# Altium PCB SISTEM.PcbDoc
Units mm, origin at the board's own origin, x right, y up, seen from the top; angles counter-clockwise.
Board outline 152.4 x 101.6 mm, 2 copper layers (Top Layer, Bottom Layer); 41 components, 50 nets, 190 pads, 45 vias.
Unrouted connection lines stored in the file: 2.
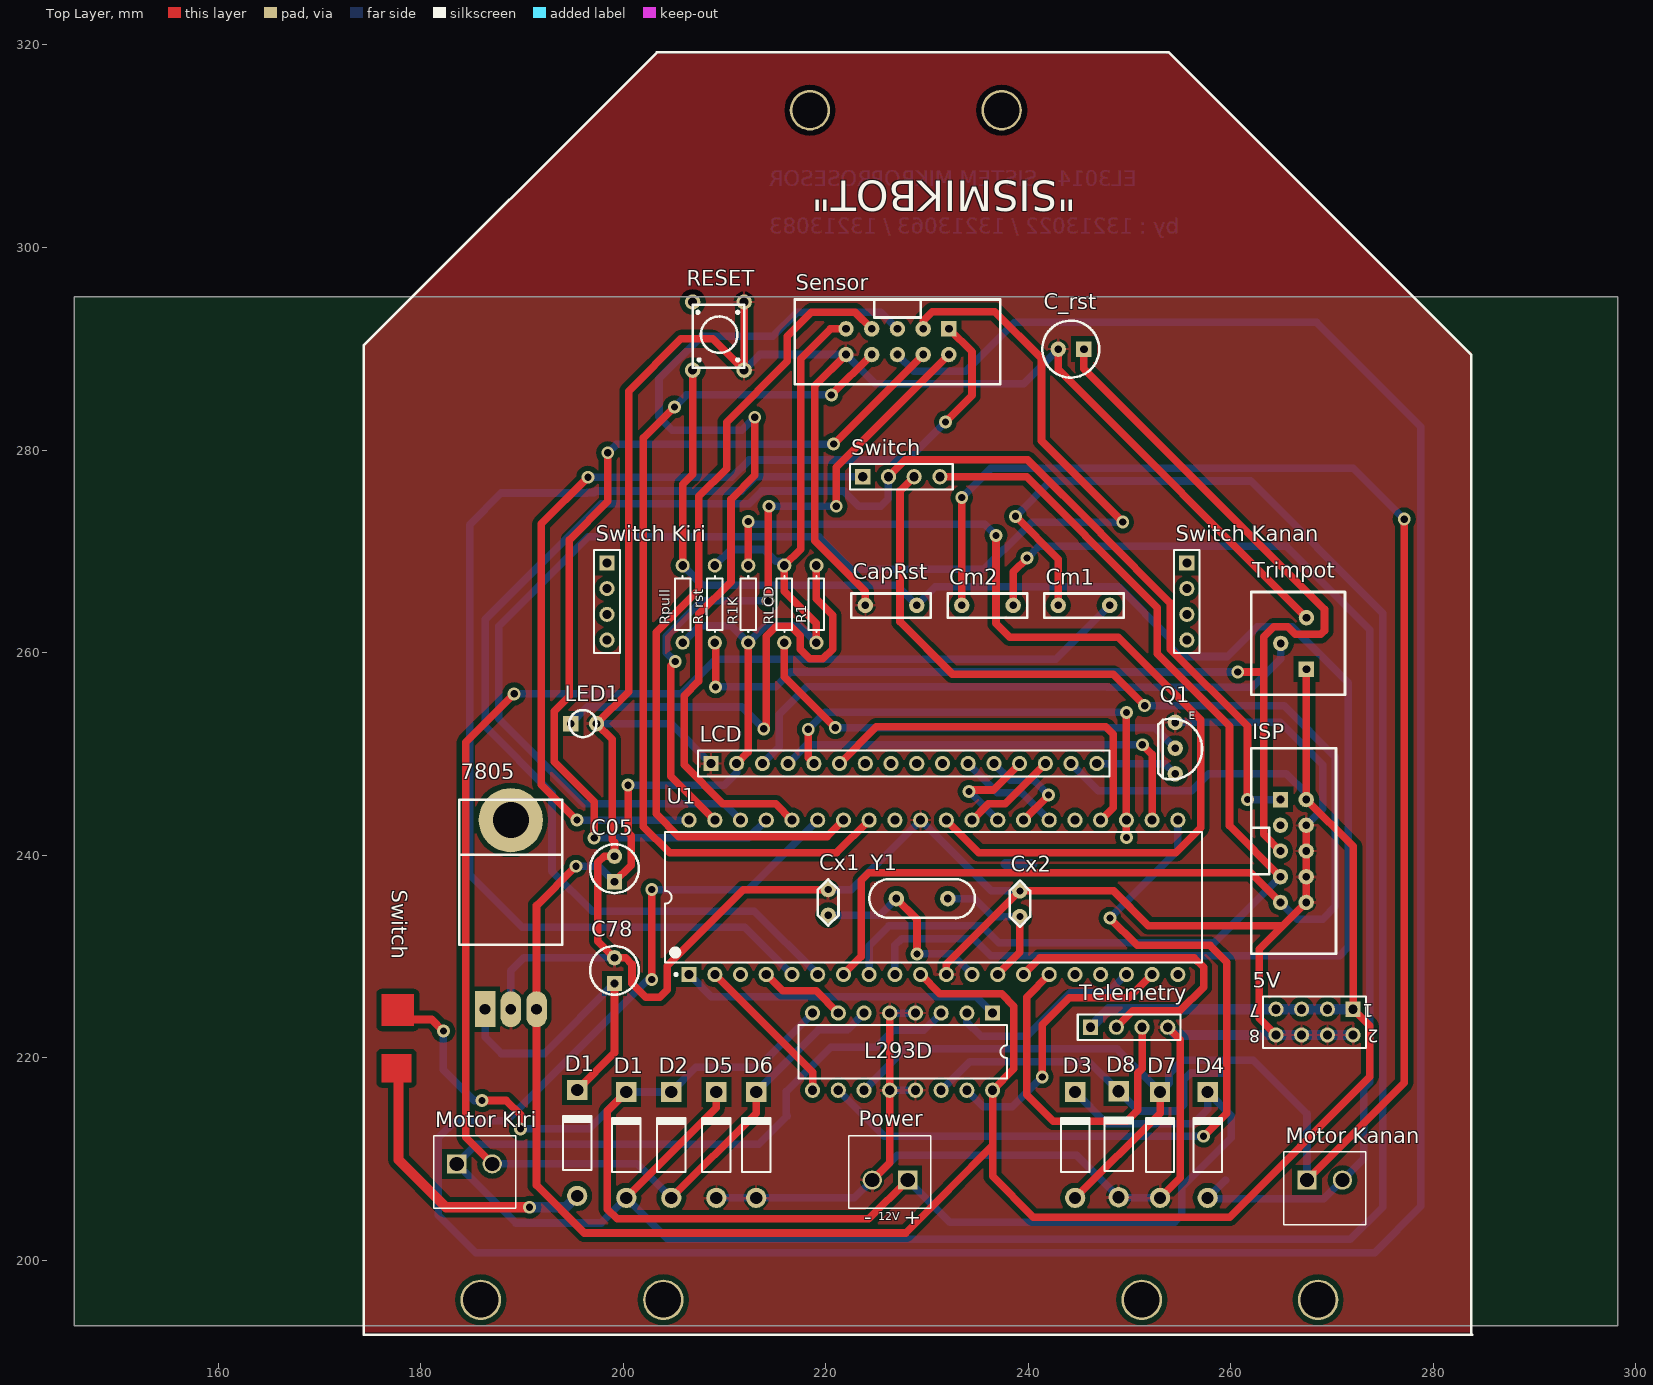
[diagram p0: Top Layer view]
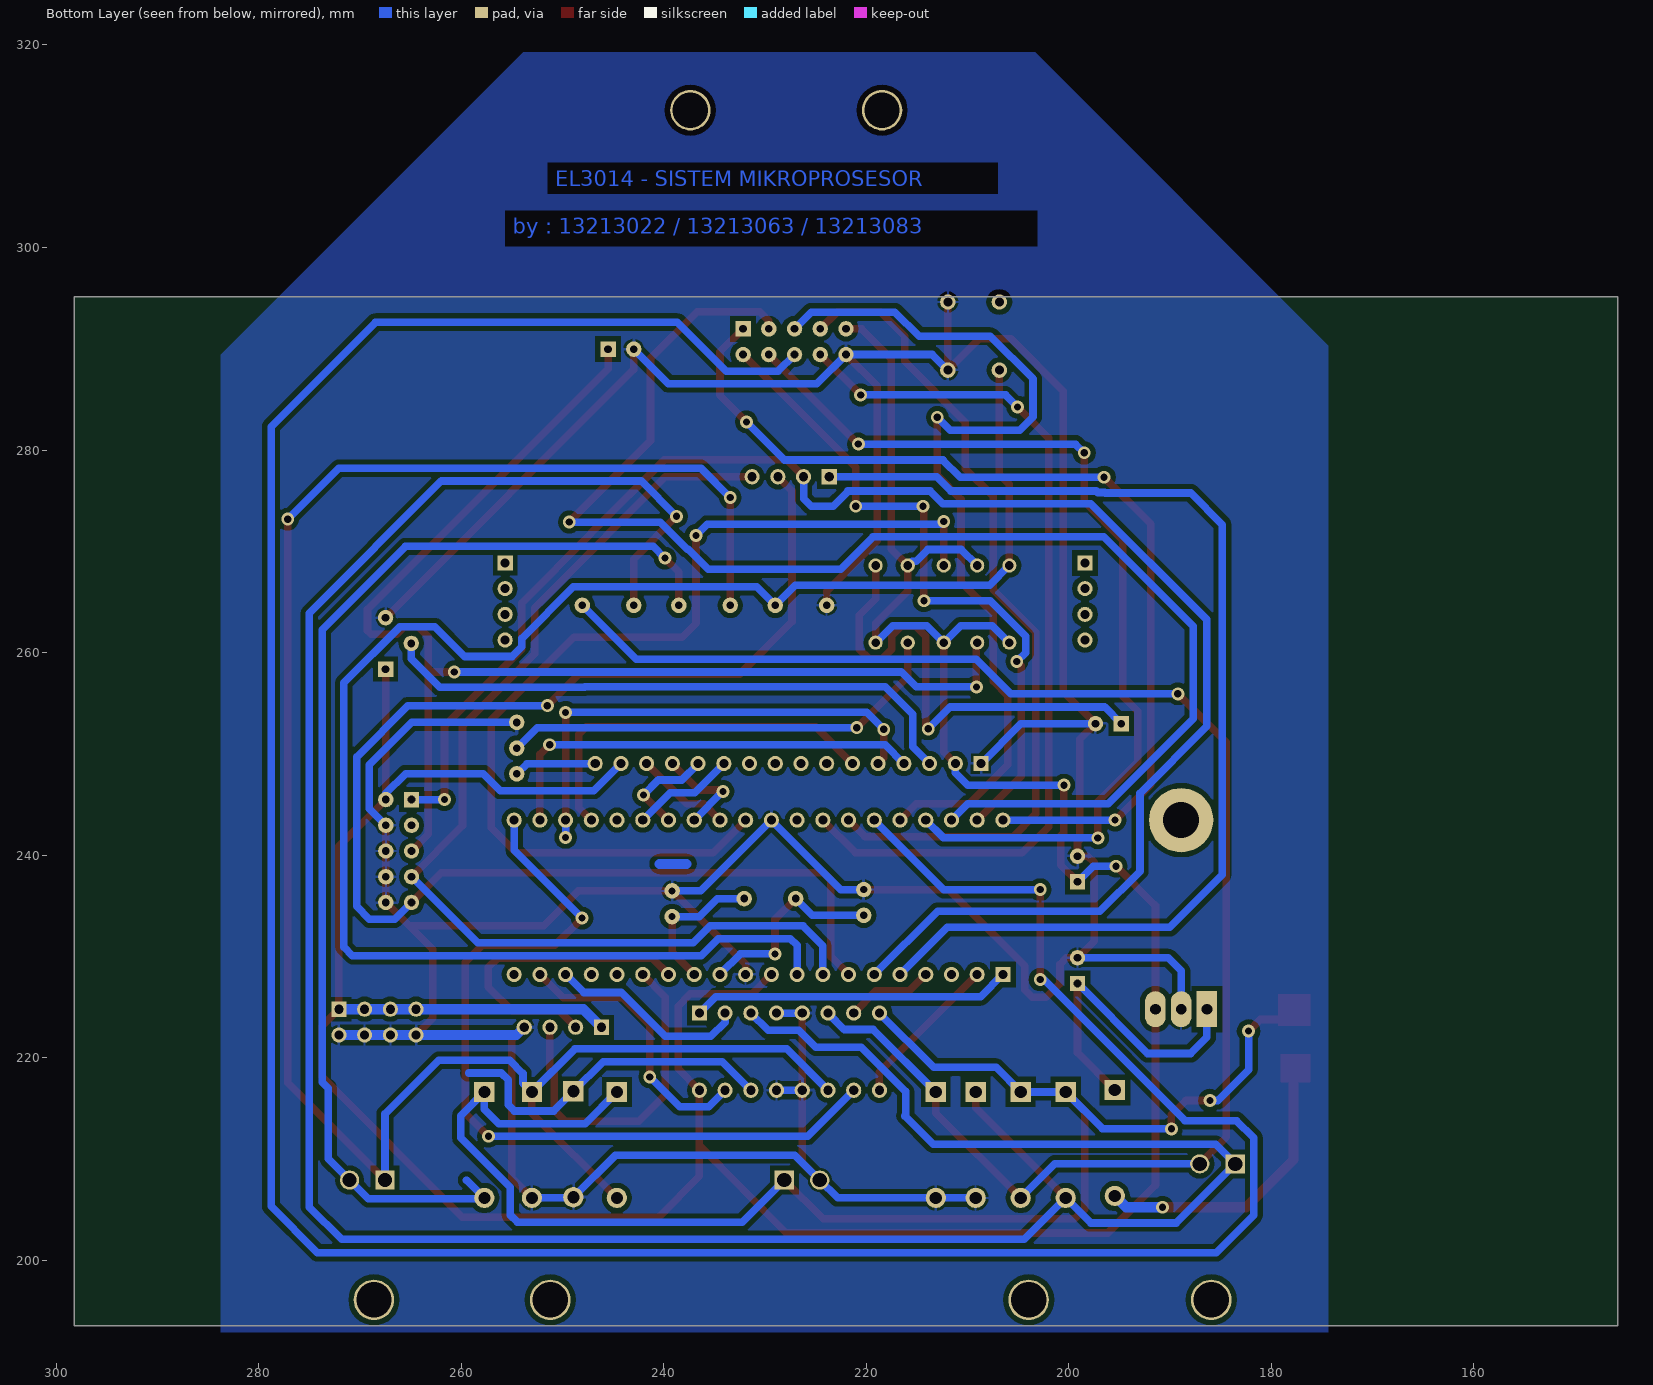
[diagram p1: Bottom Layer view, seen from below]

## Layer stack, top to bottom
Top Solder: solder mask 0.0102, Solder Resist, Dk 3.5
Top Layer: signal copper 0.0356
Dielectric 1: dielectric 0.32, FR-4, Dk 4.8
Bottom Layer: signal copper 0.0356
Bottom Solder: solder mask 0.0102, Solder Resist, Dk 3.5

## Board outline
145.796,193.548 298.196,193.548 298.196,295.148 145.796,295.148

## Design rules (kind name [scope] priority, off if disabled: settings)
Clearance Clearance_1 [All] p1: gap=0.5
Clearance Jalur [All] p2: gap=0.5
PolygonConnect [All] p1: connectstyle=Relief reliefconductorwidth=0.254 reliefentries=4 polygonreliefangle="90 Angle" airgapwidth=0.254
RoutingVias [All] p1: holewidth=0.711 width=1.27 viastyle="Through Hole" minholewidth=0.711 minwidth=1.27 maxholewidth=0.711 maxwidth=1.27
SolderMaskExpansion [All] p1: expansion=0.102
Width [All] p1: maxlimit=1 minlimit=0.5 preferedwidth=0.75
30 further rules are at their usual default settings.

## Components (designator, comment, footprint, x,y, rotation, side; value= is the part's Value field where it differs from the comment)
5V "Header 4X2" HDR2X4 272.068,224.79 r180 top
7805 "78XX/79XX" 78XX/79XX 176.657,230.886 r90 top
C05 "cap 220uF/16V" "cap 10uF/16V" 199.136,239.903 r90 top
C78 "cap 220uF/16V" "cap 10uF/16V" 199.136,229.87 r90 top
C_rst "cap 220uF/16V" "cap 220uF/16V" 245.491,289.967 r180 top
CapRst "cap MKM 100nF" "cap MKM 100nF diri" 226.441,264.668 r180 top
Cm1 "cap MKM 100nF" "cap MKM 100nF diri" 245.491,264.668 r180 top
Cm2 "cap MKM 100nF" "cap MKM 100nF diri" 235.966,264.668 r180 top
Cx1 "cap 22/33uF" "cap 22/33uF" 220.241,244.221 r270 top
Cx2 "cap 22/33uF" "cap 22/33uF" 239.164,244.094 r270 top
D1 "Diode 1N4002" DIO10.46-5.3x2.8 195.453,211.582 r90 top
D1 "Diode 1N4001" DIO10.46-5.3x2.8 200.302,211.386 r90 top
D2 "Diode 1N4001" DIO10.46-5.3x2.8 204.747,211.386 r90 top
D3 "Diode 1N4001" DIO10.46-5.3x2.8 244.625,211.386 r90 top
D4 "Diode 1N4001" DIO10.46-5.3x2.8 257.706,211.386 r90 top
D5 "Diode 1N4001" DIO10.46-5.3x2.8 209.192,211.386 r90 top
D6 "Diode 1N4001" DIO10.46-5.3x2.8 213.129,211.386 r90 top
D7 "Diode 1N4001" DIO10.46-5.3x2.8 253.007,211.386 r90 top
D8 "Diode 1N4001" DIO10.46-5.3x2.8 248.92,211.455 r90 top
ISP "Header Soket male 10 pin" "Header Soket male 10 pin" 262.357,242.951 r270 top
L293D "L293D" DIP16 227.584,220.599 r180 top (schematic designator U2)
LCD "Header 16" HDR1X16 208.661,249.047 r0 top
LED1 "LED kecil" "LED kecil" 197.358,255.524 r0 top
"Motor Kanan" "WE-Terminal Blocks Plugable Type 691321100002" 691321100002 269.263,207.918 r0 top
"Motor Kiri" "WE-Terminal Blocks Plugable Type 691321100002" 691321100002 185.316,209.518 r0 top
Power "WE-Terminal Blocks Plugable Type 691321100002" 691321100002 226.337,207.918 r180 top
Q1 "NPN 222" "NPN (222)" 254.508,250.571 r0 top
R1 "Res1" AXIAL-0.3 219.075,264.795 r270 top
R1K "Res1" AXIAL-0.3 212.344,264.795 r270 top (schematic designator L1)
R_rst "Res1" AXIAL-0.3 209.042,264.795 r90 top
RESET "pushbutton" pushbutton 209.423,280.272 r270 top
RLCD "Res1" AXIAL-0.3 215.9,264.795 r90 top
Rpull "Res1" AXIAL-0.3 205.867,264.795 r270 top
Sensor "Header Soket male 10 pin" "Header Soket male 10 pin" 229.616,294.513 r180 top
Switch "Header 4" HDR1X4 223.647,277.368 r0 top
"Switch Kanan" "Header 4" HDR1X4 255.651,268.859 r270 top
"Switch Kiri" "Header 4" HDR1X4 198.397,268.859 r270 top
Telemetry "Header 4" HDR1X4 246.149,223.012 r0 top
Trimpot "Trimpot" "Trimpot Duduk" 264.922,263.271 r180 top
U1 "ATmega32-16PI" 40P6 230.632,235.839 r90 top
Y1 "XTAL" XTAL 229.512,233.172 r0 top

## Footprints (in the part's own frame and the unit in brackets; to place one, negate y for a bottom-side part, rotate by r counter-clockwise, add the part's x,y. Pads: shape width x height; smd on the part's side, far side on the other; paste and mask are expansions set on the pad)
40P6 [mm] "DIP, 40-Leads, Row Spacing 15.24mm, Pitch 2.54mm, Body 52.2x13.95mm"
  rect 1.5x1.5 hole 0.9: 1(-7.62,24.13)
  round 1.5 hole 0.9: 2(-7.62,21.59) 3(-7.62,19.05) 4(-7.62,16.51) 5(-7.62,13.97) 6(-7.62,11.43) 7(-7.62,8.89) 8(-7.62,6.35) 9(-7.62,3.81) 10(-7.62,1.27) 11(-7.62,-1.27) 12(-7.62,-3.81) 13(-7.62,-6.35) 14(-7.62,-8.89) 15(-7.62,-11.43) 16(-7.62,-13.97) 17(-7.62,-16.51) 18(-7.62,-19.05) 19(-7.62,-21.59) 20(-7.62,-24.13) 21(7.62,-24.13) 22(7.62,-21.59) 23(7.62,-19.05) 24(7.62,-16.51) 25(7.62,-13.97) 26(7.62,-11.43) 27(7.62,-8.89) 28(7.62,-6.35) 29(7.62,-3.81) 30(7.62,-1.27) 31(7.62,1.27) 32(7.62,3.81) 33(7.62,6.35) 34(7.62,8.89) 35(7.62,11.43) 36(7.62,13.97) 37(7.62,16.51) 38(7.62,19.05) 39(7.62,21.59) 40(7.62,24.13)
  silkscreen extent -7.74,-26.5 6.45,26.5, body extent -7.05,-26.47 7.05,26.47, height 4.83
78XX/79XX [mil]
  round 250 hole 140: 0(495,-482)
  rect 140x80 hole 42: 1(-240,-382)
  oval 140x80 hole 42: 2(-240,-482) 3(-240,-582)
  silkscreen extent 10,-682 575,-282
691321100002 [mm] "3,50mm - PCB Vertical - 02p"
  rect 1.9x1.9 hole 1.4: 1(-1.75,0)
  round 1.9 hole 1.4: 2(1.75,0)
  silkscreen extent -4.05,-4.4 4.05,2.8, body extent -4.05,-4.4 4.05,2.8, height 9.21
AXIAL-0.3 [mm] "Axial Device, Thru-Hole; 2 Leads; 0.3 in Pin Spacing"
  round 1.4 hole 0.85: 1(-3.81,0) 2(3.81,0)
  silkscreen extent -2.77,-0.76 2.77,0.76
"cap 10uF/16V" [mil]
  rect 60x60 hole 30: 1(-100,0)
  round 60 hole 30: 2(0,0)
  silkscreen extent -144,-95 46,95
"cap 22/33uF" [mil]
  round 60 hole 28: 1(300,0) 2(400,0)
  silkscreen extent 260,-40 440,40
"cap 220uF/16V" [mil]
  rect 60x60 hole 30: 1(0,0)
  round 60 hole 30: 2(100,0)
  silkscreen extent -59,-111 162,111
"cap MKM 100nF diri" [mil]
  round 60 hole 30: 1(-100,0) 2(100,0)
  silkscreen extent -154,-46 154,48
DIO10.46-5.3x2.8 [mm] "Diode, Axial; Body 5.2 x 2.7 mm (LxDia. max), Lead Dia. 0.86 mm (max)"
  round 2 hole 1.2: 1(-5.23,0)
  rect 2x2 hole 1.2: 2(5.23,0)
  silkscreen extent -2.65,-1.4 2.75,1.4
DIP16 [mm] "DIP; 16 Leads; Row Spacing 7.62 mm; Pitch 2.54 mm"
  rect 1.5x1.5 hole 0.9: 1(-8.89,-3.81)
  round 1.5 hole 0.9: 2(-6.35,-3.81) 3(-3.81,-3.81) 4(-1.27,-3.81) 5(1.27,-3.81) 6(3.81,-3.81) 7(6.35,-3.81) 8(8.89,-3.81) 9(8.89,3.81) 10(6.35,3.81) 11(3.81,3.81) 12(1.27,3.81) 13(-1.27,3.81) 14(-3.81,3.81) 15(-6.35,3.81) 16(-8.89,3.81)
  silkscreen extent -10.3,-2.65 10.3,2.65
HDR1X4 [mm] "Connector; Header; 4 Position"
  rect 1.5x1.5 hole 0.9: 1(0,0)
  round 1.5 hole 0.9: 2(2.54,0) 3(5.08,0) 4(7.62,0)
  silkscreen extent -1.27,-1.27 8.89,1.27
HDR1X16 [mm] "Connector; Header; 16 Position"
  rect 1.5x1.5 hole 0.9: 1(0,0)
  round 1.5 hole 0.9: 2(2.54,0) 3(5.08,0) 4(7.62,0) 5(10.16,0) 6(12.7,0) 7(15.24,0) 8(17.78,0) 9(20.32,0) 10(22.86,0) 11(25.4,0) 12(27.94,0) 13(30.48,0) 14(33.02,0) 15(35.56,0) 16(38.1,0)
  silkscreen extent -1.27,-1.27 39.37,1.27
HDR2X4 [mm] "Connector; Header; 4x2 Position"
  rect 1.5x1.5 hole 0.9: 1(0,0)
  round 1.5 hole 0.9: 2(0,2.54) 3(2.54,0) 4(2.54,2.54) 5(5.08,0) 6(5.08,2.54) 7(7.62,0) 8(7.62,2.54)
  silkscreen extent -1.27,-1.27 8.89,3.81
"Header Soket male 10 pin" [mil]
  rect 60x60 hole 30: 1(-100,100)
  round 60 hole 30: 2(-100,200) 3(0,100) 4(0,200) 5(100,100) 6(100,200) 7(200,100) 8(200,200) 9(300,100) 10(300,200)
  silkscreen extent -300,-14 500,316
"LED kecil" [mil]
  rect 60x60 hole 30: 1(-100,-100)
  round 60 hole 30: 2(0,-100)
  silkscreen extent -106,-153 0,-47
"NPN (222)" [mil]
  round 60 hole 30: 1(0,100) 2(0,0) 3(0,-100)
  silkscreen extent -66,-122 104,115
pushbutton [mil]
  round 60 hole 35: 1(-565,-101) 1(-300,-101) 2(-565,99) 2(-300,99)
  silkscreen extent -555,-101 -310,99
"Trimpot Duduk" [mil]
  rect 60x60 hole 30: 1(-100,193)
  round 60 hole 30: 2(0,93) 3(-100,-7)
  silkscreen extent -250,-107 115,293
XTAL [mil]
  round 60 hole 30: 1(-100,100) 2(100,100)
  silkscreen extent -205,25 205,175

## Part data
5V: "Header, 4-Pin, Dual row"
7805: library part 7805/7809/7812/7905/7909/7912
C05 C78: library part "cap 10uF/16V"
D1 D1 D2 D3 D4 D5 D6 D7 D8: "1 Amp General Purpose Rectifier"
L293D: "Push-Pull Four Channel Driver With Diode"
LCD: "Header, 16-Pin"
"Motor Kanan" "Motor Kiri" Power: "WR-TBL Terminal block - serie 3211 - 3.50 mm"
Q1: library part "NPN (222)"
R1 R1K R_rst RLCD Rpull: "Resistor"
Switch "Switch Kanan" "Switch Kiri" Telemetry: "Header, 4-Pin"
Trimpot: library part "Trimpot Duduk"
U1: "8-Bit AVR Microcontroller with 32K Bytes of In-System Programmable Flash Memory"

## Free pads (board coordinates)
  round 4 hole 3.5: 2(203.962,196.088) 2(237.363,313.563) 2(251.206,196.088) 3(268.605,196.088) 4(185.928,196.088) 4(218.44,313.563)

## Via types
v1: diameter 1.27, hole 0.711, Top Layer to Bottom Layer, 45 vias

## Nets (pads, with @x,y where several pads share a name; then routed paths per layer and width w, separated by ;. In a path a pad name is that pad's centre, name@x,y a point inside that pad or via, vN(x,y) a via of type N, cw(c..) or ccw(c..) an arc to the next point about the centre after c; other vN are vias at no path point)
12-V: D1.1@195.453,206.352 | length 29.8
  Top Layer w1: 177.8,219.71 177.8,209.931 182.499,205.232 v1(190.754,205.232)
  Bottom Layer w1: v1(190.754,205.232) 194.333,205.232 D1.1@195.453,206.352
12V: D1.2@200.302,216.616 D2.2 D3.2 D4.2 L293D.8 Power.1 | length 157.4
  Top Layer w0.75: 178.435,223.774 181.102,223.774 v1(182.245,222.631) ; v1(186.055,215.773) 188.468,215.773 189.865,214.376 v1(189.865,212.979) ; D1.2@200.302,216.616 198.425,214.739 198.425,205.054 199.39,204.089 224.258,204.089 Power.1
  Bottom Layer w0.75: v1(182.245,222.631) 182.245,218.821 185.293,215.773 v1(186.055,215.773) ; v1(189.865,212.979) 196.665,212.979 200.302,216.616 D2.2 207.171,219.041 213.326,219.041 L293D.8 ; Power.1 232.246,203.759 254.432,203.759 255.143,204.47 255.143,207.188 260.045,212.09 260.045,214.276 D4.2 257.706,214.91 256.286,213.491 247.75,213.491 D3.2
12VOLT: 7805.1 C78.1 D1.2@195.453,216.812 | length 31.1
  Top Layer w0.75: D1.2@195.453,216.812 199.136,220.495 C78.1
  Bottom Layer w0.75: 7805.1 186.36,222.021 187.96,220.421 192.227,220.421 C78.1
B1: Switch.1 U1.5 | length 111.3
  Bottom Layer w0.75: U1.5 212.014,232.867 190.017,232.867 184.836,238.049 184.836,272.639 187.96,275.764 196.389,275.764 196.433,275.807 197.145,275.807 197.3,275.962 209.249,275.962 211.641,275.962 213.047,277.368 Switch.1
B2: ISP.1 Switch.2 U1.6 | length 166.5
  Top Layer w0.75: Switch.2 227.863,279.044 239.918,279.044 247.142,271.821 247.142,271.78 254.025,264.897 254.025,260.35 261.645,252.73 v1(261.645,245.491)
  Bottom Layer w0.75: U1.6 212.954,234.467 196.926,234.467 192.964,238.43 192.964,246.126 186.36,252.73 186.36,263.271 186.377,263.271 197.818,274.712 212.432,274.712 213.676,275.957 221.807,275.957 221.807,275.906 223.266,274.447 225.425,274.447 226.187,275.209 Switch.2 ; v1(261.645,245.491) ISP.1
B3: ISP.9 Switch.3 U1.7 | length 137.7
  Top Layer w0.75: U1.7 223.52,229.997 223.52,237.541 224.231,238.252 261.976,238.252 ISP.9 ; Switch.3 227.33,275.971 227.33,263.042 232.512,257.861 248.387,257.861 v1(251.485,254.762)
  Bottom Layer w0.75: v1(251.485,254.762) 265.252,254.762 270.324,249.691 270.324,234.95 269.054,233.68 266.548,233.68 ISP.9
B4: ISP.7 Switch.4 U1.8 | length 106.1
  Top Layer w0.75: Switch.4 239.827,277.368 245.618,271.577 245.618,271.536 252.73,264.424 252.73,259.878 259.867,252.74 259.867,242.9 ISP.7
  Bottom Layer w0.75: U1.8 224.282,231.047 226.246,233.011 235.404,233.011 237.078,231.337 258.363,231.337 ISP.7
DIR1: L293D.2 U1.18 | length 19.7
  Bottom Layer w0.75: L293D.2 233.934,223.52 235.331,222.123 239.852,222.123 244.17,226.441 247.904,226.441 U1.18
DIR2: L293D.15 U1.19 | length 27.4
  Top Layer w0.75: v1(241.376,218.11) 241.376,223.241 244.043,225.908 249.911,225.908 U1.19
  Bottom Layer w0.75: L293D.15 235.56,215.163 238.43,215.163 v1(241.376,218.11)
EN1: L293D.1 U1.1 | length 31.6
  Bottom Layer w0.75: U1.1 208.686,226.035 234.848,226.035 L293D.1
EN2: L293D.9 U1.2 | length 15.4
  Top Layer w0.75: U1.2 218.694,218.567 L293D.9
GND: 5V.2 5V.4 5V.6 5V.8 7805.2 C05.2 C78.2 C_rst.2 CapRst.2 Cx1.1 Cx2.1 D5.1 D6.1 D7.1 D8.1 ISP.4 ISP.6 ISP.8 ISP.10 L293D.4 L293D.5 L293D.12 L293D.13 LCD.1 LED1.2 Power.2 Q1.1 RESET.2 Sensor.10 Telemetry.4 Trimpot.3 U1.11 U1.31 | length 453.7
  Top Layer w0.75: RESET.2@211.938,294.623 211.938,287.892 208.847,290.982 205.689,290.982 200.526,285.82 200.526,256.152 LED1.2 198.9,251.442 198.9,241.516 199.136,241.28 C05.2 198.12,239.903 197.496,239.279 197.496,231.51 C78.2 200.228,229.87 200.863,229.235 200.863,227.33 202.235,225.958 203.606,225.958 204.343,226.695 204.343,229.083 211.861,236.601 Cx1.1 ; Sensor.10 218.922,286.359 218.922,271.047 223.901,266.068 CapRst.2 ; Power.2 226.314,209.645 L293D.12 L293D.5 ; U1.11 231.902,229.212 Cx2.1 248.409,236.474 251.864,233.02 265.125,233.02 ; C_rst.2 242.951,287.96 Trimpot.3 ; D7.1 254.991,208.14 254.991,221.79 Telemetry.4 ; 5V.8 262.814,223.884 262.814,230.708 265.125,233.02 ; ISP.4 ISP.6 ISP.8 ISP.10 265.125,233.02
  Bottom Layer w0.75: 7805.2 188.9,228.6 190.17,229.87 C78.2 ; LED1.2 204.724,252.984 LCD.1 ; D5.1 D6.1 222.825,206.156 Power.2 227.057,210.388 244.757,210.388 D8.1 248.989,206.156 D7.1 ; RESET.2@211.938,287.892 213.479,289.433 Sensor.10 224.883,286.546 239.53,286.546 C_rst.2 ; Cx1.1 222.504,236.601 U1.31 236.347,236.474 Cx2.1 ; L293D.12 L293D.13 ; L293D.5 L293D.4 ; Q1.1 264.883,253.111 269.074,248.92 269.074,244.588 ISP.4
  Bottom Layer w1: Telemetry.4 254.531,222.25 5V.8 5V.6 5V.4 5V.2
NetCm1_1: "Motor Kiri.2" Cm1.1 D2.1 D6.2 L293D.6 | length 158.8
  Top Layer w0.75: 187.066,209.518 184.455,212.129 184.455,251.155 v1(189.23,255.93) ; D2.1 213.129,214.538 D6.2
  Bottom Layer w0.75: 187.066,209.518 201.385,209.518 D2.1 ; v1(189.23,255.93) 205.715,255.93 209.137,259.352 242.715,259.352 Cm1.1 ; D6.2 219.296,222.783 222.148,222.783 L293D.6
NetCm1_2: "Motor Kiri.1" Cm1.2 D1.1@200.302,206.156 D5.2 L293D.3 | length 279.8
  Top Layer w0.75: D1.1@200.302,206.156 209.192,215.046 D5.2 ; v1(238.735,273.456) 242.951,269.24 Cm1.2
  Bottom Layer w0.75: L293D.3 229.692,222.707 226.644,222.707 224.98,221.043 220.485,221.043 216.103,216.662 216.103,214.325 216.179,214.249 213.385,211.455 185.503,211.455 183.566,209.518 189.401,203.683 197.828,203.683 200.302,206.156 204.4,202.057 271.78,202.057 274.98,205.257 274.98,263.906 261.939,276.948 242.226,276.948 v1(238.735,273.456)
NetCm2_1: "Motor Kanan.2" Cm2.1 D4.1 D8.2 L293D.14 | length 149.1
  Top Layer w0.75: Cm2.1 238.506,267.97 v1(239.869,269.333)
  Bottom Layer w0.75: L293D.14 234.225,219.62 245.985,219.62 D8.2 250.864,214.741 254.746,214.741 255.346,215.341 255.346,217.805 256.032,218.491 259.25,218.491 ; v1(239.869,269.333) 241.021,270.485 265.49,270.485 273.71,262.265 273.71,217.576 273.113,216.98 273.113,210.019 271.013,207.918 269.188,206.093 257.706,206.093 D4.1 259.468,207.918
NetCm2_2: "Motor Kanan.1" Cm2.2 D3.1 D7.2 L293D.11 | length 198.5
  Top Layer w0.75: Cm2.2 v1(233.426,275.311) ; D3.1 253.007,214.538 D7.2 ; 267.513,207.918 277.114,217.519 v1(277.114,273.177)
  Bottom Layer w0.75: L293D.11 227.855,220.87 248.753,220.87 D7.2 253.893,217.502 253.893,218.44 255.194,219.741 262.224,219.741 267.513,214.452 267.513,207.918 ; v1(233.426,275.311) 236.313,278.198 272.093,278.198 v1(277.114,273.177)
NetCx1_2: Cx1.2 U1.12 Y1.1 | length 20
  Top Layer w0.75: Y1.1 229.006,233.677 v1(229.006,230.251)
  Bottom Layer w0.75: Cx1.2 225.321,234.061 Y1.1 ; v1(229.006,230.251) 232.41,230.251 U1.12
NetCx2_2: Cx2.2 U1.13 Y1.2 | length 14.5
  Top Layer w0.75: U1.13 239.164,230.401 Cx2.2
  Bottom Layer w0.75: Y1.2 234.696,235.712 236.474,233.934 Cx2.2
NetL1_1: R1K.1 U1.30 | length 100.4
  Top Layer w0.75: R1K.1 v1(212.344,272.948) ; U1.30 235.128,240.233 254.559,240.233 257.023,242.697 257.023,253.39 248.895,261.518 238.176,261.518 236.804,262.89 v1(236.804,271.577)
  Bottom Layer w0.75: v1(212.344,272.948) 212.598,272.694 235.687,272.694 v1(236.804,271.577)
NetLCD_3: LCD.3 Trimpot.2 | length 58.9
  Bottom Layer w0.75: LCD.3 215.411,250.717 215.411,253.917 218.106,256.612 247.777,256.612 247.81,256.579 262.091,256.579 264.922,259.41 Trimpot.2
NetLCD_16: LCD.16 Q1.3 | length 8.2
  Bottom Layer w0.75: LCD.16 253.492,249.047 Q1.3
NetLED1_1: LED1.1 R1.1 | length 48.2
  Top Layer w0.75: v1(213.868,252.476) 214.122,252.73 214.122,261.62 215.087,262.585 216.535,262.585 217.475,261.645 217.475,260.35 218.44,259.385 219.71,259.385 220.675,260.35 220.675,263.703 219.075,265.303 R1.1
  Bottom Layer w0.75: LED1.1 196.469,254.635 211.709,254.635 v1(213.868,252.476)
NetQ1_2: Q1.2 RLCD.1 | length 44.9
  Top Layer w0.75: RLCD.1 215.9,257.632 v1(220.941,252.592)
  Bottom Layer w0.75: v1(220.941,252.592) 252.487,252.592 Q1.2
P1: U1.3
P2: U1.20
P3: U1.17
P4: U1.16
PA0: Sensor.1 U1.40 | length 97.1
  Top Layer w0.75: v1(195.428,243.459) 191.922,246.964 191.922,272.72 v1(196.52,277.317) ; v1(231.826,282.778) 234.442,285.394 234.442,289.687 Sensor.1
  Bottom Layer w0.75: v1(195.428,243.459) U1.40 ; v1(196.52,277.317) 210.718,277.317 212.42,279.019 228.067,279.019 v1(231.826,282.778)
PA1: Sensor.2 U1.39 | length 67.6
  Top Layer w0.75: v1(205.13,259.131) 204.694,258.694 204.694,247.807 U1.39 ; v1(214.3,265.125) 214.3,274.345 v1(214.401,274.447) ; v1(221.031,274.447) 221.031,278.308 Sensor.2
  Bottom Layer w0.75: v1(205.13,259.131) 204.267,259.994 204.267,261.62 207.772,265.125 v1(214.3,265.125) ; v1(214.401,274.447) v1(221.031,274.447)
PA2: Sensor.3 U1.38 | length 139.9
  Top Layer w0.75: Sensor.3 229.616,292.785 230.505,293.674 236.678,293.674 241.3,289.052 241.3,280.924 v1(249.326,272.898)
  Bottom Layer w0.75: U1.38 209.956,245.085 196.113,245.085 187.706,253.492 187.706,262.611 196.525,271.43 219.329,271.43 222.535,268.224 235.587,268.224 237.566,270.203 237.67,270.203 240.32,272.854 249.283,272.854 v1(249.326,272.898)
PA3: Sensor.4 U1.37 | length 94.7
  Top Layer w0.75: v1(197.129,241.706) 197.129,245.276 193.181,249.225 193.181,254.217 194.666,255.702 194.666,271.12 198.476,274.93 v1(198.476,279.73) ; v1(220.777,280.594) Sensor.4
  Bottom Layer w0.75: v1(197.129,241.706) 212.369,241.706 U1.37 ; v1(198.476,279.73) 199.339,280.594 v1(220.777,280.594)
PA4: Sensor.5 U1.36 | length 91.3
  Top Layer w0.75: v1(212.979,283.235) 212.979,277.495 210.642,275.158 210.642,267.005 207.467,263.83 207.467,257.2 206.005,255.739 206.005,248.92 209.841,245.085 215.036,245.085 U1.36
  Bottom Layer w0.75: v1(212.979,283.235) 211.709,281.965 204.851,281.965 203.53,283.286 203.53,287.02 207.747,291.236 214.782,291.236 217.17,293.624 225.425,293.624 Sensor.5
PA5: Sensor.6 U1.35 | length 299.4
  Top Layer w0.75: v1(202.819,227.711) v1(202.819,236.601)
  Bottom Layer w0.75: v1(202.819,227.711) 202.438,227.711 188.519,213.792 183.439,213.792 181.737,212.09 181.737,204.445 185.42,200.762 274.193,200.762 278.765,205.334 278.765,282.321 268.453,292.633 238.644,292.633 233.807,287.796 228.713,287.796 Sensor.6 ; v1(202.819,236.601) 212.344,236.601 U1.35
PA6: Sensor.7 U1.34 | length 82.6
  Top Layer w0.75: U1.34 220.116,241.833 205.48,241.833 203.242,244.071 203.242,261.993 207.467,266.217 207.467,275.437 210.204,278.174 210.204,282.746 216.215,288.757 216.215,291.252 218.587,293.624 222.885,293.624 Sensor.7
PA7: Sensor.8 U1.33 | length 89
  Top Layer w0.75: v1(205.054,284.251) 201.992,281.189 201.992,242.821 204.58,240.233 221.056,240.233 U1.33 ; v1(220.548,285.445) Sensor.8
  Bottom Layer w0.75: v1(205.054,284.251) 206.248,285.445 v1(220.548,285.445)
PC0: LCD.4 U1.22 | length 43.6
  Top Layer w0.75: v1(251.257,250.901) 252.222,249.936 U1.22
  Bottom Layer w0.75: LCD.4 218.135,250.901 v1(251.257,250.901)
PC1: LCD.5 U1.23 | length 49.8
  Top Layer w0.75: v1(218.262,252.425) 218.262,249.606 LCD.5 ; v1(249.682,241.757) U1.23 v1(249.682,254.102)
  Bottom Layer w0.75: v1(218.262,252.425) 219.939,254.102 v1(249.682,254.102) ; v1(249.682,241.757) U1.23
PC2: LCD.6 U1.24 | length 37.8
  Top Layer w0.75: LCD.6 224.993,252.679 247.65,252.679 248.387,251.943 248.387,244.704 U1.24
PC3: U1.25
PC4: LCD.11 U1.26 | length 10.3
  Bottom Layer w0.75: LCD.11 236.936,246.172 239.349,246.172 U1.26
PC5: LCD.12 U1.27 | length 10.2
  Top Layer w0.75: U1.27 v1(241.998,245.935)
  Bottom Layer w0.75: LCD.12 238.226,247.422 240.512,247.422 v1(241.998,245.935)
PC6: LCD.13 U1.28 | length 10.1
  Top Layer w0.75: v1(234.15,246.291) 234.29,246.431 236.525,246.431 LCD.13
  Bottom Layer w0.75: v1(234.15,246.291) U1.28
PC7: LCD.14 U1.29 | length 9.6
  Top Layer w0.75: U1.29 236.068,245.085 237.719,245.085 LCD.14
PWM1: L293D.7 U1.4 | length 8.7
  Top Layer w0.75: U1.4 215.748,226.593 219.05,226.593 L293D.7
PWM2: L293D.10 U1.21 | length 81.9
  Top Layer w0.75: v1(248.056,233.782) 250.744,231.094 257.937,231.094 259.588,229.443 259.588,214.528 v1(257.3,212.241)
  Bottom Layer w0.75: L293D.10 225.782,212.241 v1(257.3,212.241) ; v1(248.056,233.782) 254.762,240.487 U1.21
RESET: CapRst.1 RESET.1 Rpull.1 U1.9 | length 169.7
  Top Layer w0.75: Rpull.1 205.867,276.606 206.858,277.597 RESET.1@206.858,287.892
  Bottom Layer w0.75: Rpull.1 207.823,266.649 227,266.649 CapRst.1 230.81,266.497 248.92,266.497 254.026,261.391 254.026,260.566 254.979,259.613 259.639,259.613 262.585,262.56 266.036,262.56 271.574,257.022 271.574,230.934 270.727,230.087 236.288,230.087 234.614,231.761 227.496,231.761 226.822,231.087 U1.9
RST: C_rst.1 ISP.5 R_rst.1 | length 125.5
  Top Layer w0.75: R_rst.1 209.118,260.909 v1(209.118,256.616) ; C_rst.1 245.491,288.036 269.24,264.287 269.24,262.179 268.859,261.798 266.348,261.798 265.6,262.546 264.244,262.546 263.26,261.561 263.26,258.089 ; v1(260.68,258.089) 263.26,258.089 ; ISP.5 263.26,242.048 263.26,258.089
  Bottom Layer w0.75: v1(209.118,256.616) 215.063,256.616 216.537,258.089 v1(260.68,258.089)
RX: Telemetry.2 U1.14 | length 31
  Top Layer w0.75: U1.14 241.147,229.844 256.388,229.844 257.302,228.93 257.302,226.974 254.965,224.637 250.314,224.637 Telemetry.2
TX: Telemetry.3 U1.15 | length 33.7
  Top Layer w0.75: U1.15 239.827,225.984 239.827,216.366 242.452,213.741 249.733,213.741 250.8,214.808 250.8,218.491 251.229,218.92 Telemetry.3
VCC: 5V.1 5V.3 5V.5 5V.7 7805.3 C05.1 ISP.2 L293D.16 LCD.2 LCD.15 R1.2 R1K.2 R_rst.2 RLCD.2 Rpull.2 Sensor.9 Telemetry.1 Trimpot.1 U1.10 | length 351.7
  Top Layer w0.75: v1(195.326,238.912) 191.44,235.026 7805.3 191.44,207.416 196.164,202.692 227.914,202.692 236.474,211.379 ; C05.1 200.773,239 200.773,241.907 200.482,242.198 v1(200.482,246.913) ; LCD.2 212.344,250.19 R1K.2 ; R1.2 219.075,262.89 215.9,266.065 RLCD.2 217.52,270.225 217.52,289.027 220.466,291.973 Sensor.9 ; U1.10 231.267,226.314 237.363,226.314 238.577,225.1 238.577,218.892 L293D.16 236.474,211.379 ; Trimpot.1 267.462,251.943 267.437,251.917 ISP.2 272.068,240.86 5V.1 273.71,223.147 273.71,218.11 259.867,204.267 240.487,204.267 236.474,208.28 236.474,211.379
  Bottom Layer w0.75: v1(195.326,238.912) 197.587,238.912 C05.1 ; v1(200.482,246.913) 209.982,246.913 211.201,248.133 LCD.2 ; Rpull.2 207.538,262.656 210.673,262.656 R1K.2 214.025,262.666 217.394,262.666 R1.2 ; R_rst.2 210.617,270.18 213.919,270.18 215.062,269.037 215.468,269.037 RLCD.2 ; LCD.15 246.888,246.38 256.134,246.38 257.81,248.056 265.481,248.056 267.437,246.101 ISP.2
  Bottom Layer w1: Telemetry.1 247.927,224.79 5V.7 5V.5 5V.3 5V.1
pads on no net: 7805.0 "Switch Kanan.1" "Switch Kanan.2" "Switch Kanan.3" "Switch Kanan.4" "Switch Kiri.1" "Switch Kiri.2" "Switch Kiri.3" "Switch Kiri.4" ISP.3 LCD.7 LCD.8 LCD.9 LCD.10 U1.32
copper on no net: | length 2.6
  Bottom Layer w1: 237.744,239.141 240.385,239.141

## Polygon pours and split planes (outlines as drawn)
GND on Top Layer "Bottom Layer-No Net" (solid, pour order 4): 174.498,192.913 283.591,192.913 283.718,193.04 283.718,289.687 283.337,289.687 253.746,319.278 253.619,319.151 203.454,319.151 203.2,319.151 174.498,290.449 174.498,192.532
GND on Bottom Layer "Bottom Layer-No Net" (solid, pour order 6): 174.371,192.913 283.718,192.913 283.718,289.433 253.873,319.278 253.746,319.278 203.327,319.278 203.073,319.024 174.371,290.322 174.371,192.659

## Other copper
Top Layer:
  rectangle net 12V: 176.149,223.139 179.324,226.314
  rectangle net 12-V: 176.149,217.551 179.07,220.345
Bottom Layer:
  text "EL3014 - SISTEM MIKROPROSESOR" at 250.698,306.07 h1.52
  text "by : 13213022 / 13213063 / 13213083" at 254.889,301.371 h1.52

## Silkscreen, mask and mechanical layers (free items; w line width, h text height)
Top Overlay:
  lines w0.254: 283.718,192.659 283.718,287.401 283.718,289.433 253.873,319.278 251.841,319.278 237.236,319.278 203.327,319.278 174.371,290.322 174.371,290.068 174.371,288.036 174.371,192.659 283.845,192.659
  text "\"SISMIKBOT\"" at 244.729,306.578 h3 r180
  text "Switch" at 177.165,236.601 h1.52 r270
  text "12V" at 225.171,203.962 h0.8
  text "-" at 223.774,203.581 h1.52
  text "+" at 227.711,203.581 h1.52

## Dimensions
203.327,319.278 to 253.873,319.278 on Top Overlay
237.363,313.563 to 253.873,319.278 on Top Overlay
97.917,34.163 to 207.899,36.322 on Top Overlay
270.828,191.135 to 183.834,186.182 on Top Overlay
171.07,183.642 to 186.056,181.483 on Top Overlay
268.606,183.007 to 283.592,180.848 on Top Overlay
184.405,183.515 to 205.487,183.642 on Top Overlay
249.429,183.134 to 270.511,183.261 on Top Overlay
174.498,190.627 to 283.464,191.516 on Top Overlay
174.244,224.282 to 172.974,219.202 on Top Overlay
218.44,313.563 to 237.363,313.563 on Top Overlay

## Text inside footprints (layer, text, board x,y; h text height)
5V: Top Overlay "2" at 274.608,222.758 h1.27 r180; Top Overlay "1" at 274.1,225.298 h1.27 r180; Top Overlay "7" at 262.924,225.298 h1.27 r180; Top Overlay "8" at 262.924,222.758 h1.27 r180
Q1: Top Overlay "E" at 255.829,253.416 h0.76